# EAGLE board IO Valve (EAGLE 9.2.2)
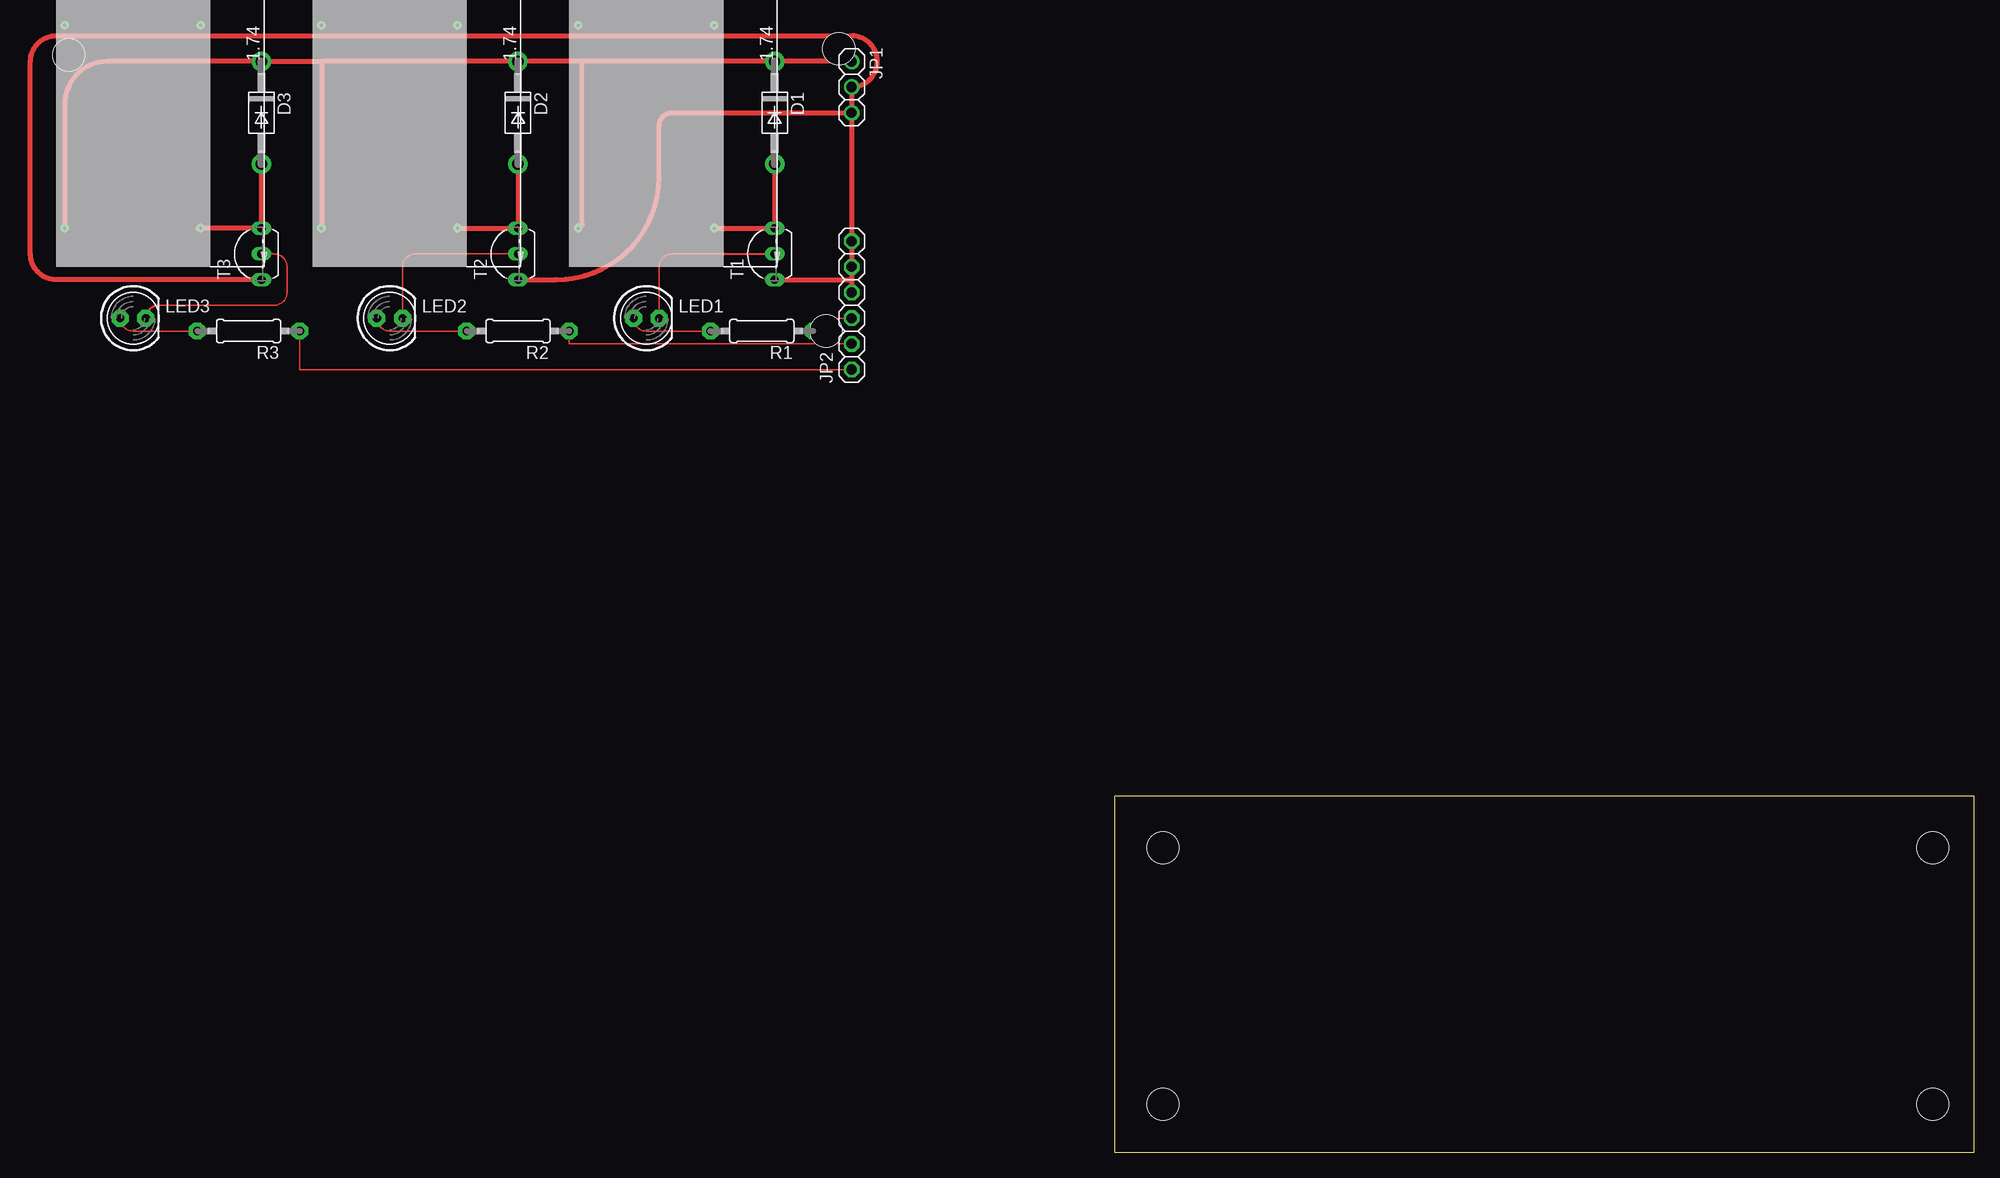
[diagram p0: board, top side]

Size 85.07 x 35.23 mm. Coordinates in mm from the lower left corner, seen from the top.
Outline: 0,0 85.07,0 85.07,35.23 0,35.23 0,0
Copper layers (1*16): Top 0.035mm / dielectric 1.5mm / Bottom 0.035mm
Design rules "OthermillDRC_30_deg_v2": minimum track width 6mil, minimum drill 0.8mm, track to track 6mil, track to pad 6mil, pad to pad 6mil, via to via 6mil, smd to smd 0mil, copper to edge 0mil, drill to drill 6mil, minimum pad ring 10mil, minimum via ring 10mil, stop-mask expansion 1mil, vias tented up to drill 30mil, thermal gap 6mil
Holes 3.17 mm at -103.5,108.58 -27.3,109.22 -28.57,81.28 4.76,4.76 4.76,30.16 80.96,4.76 80.96,30.16

## Footprints (pad centres in the part's own frame; a part is rotated, then mirrored left to right if it is on the bottom)
DO41-10 = drill 1.118 pad 1.93: A 5.08,0; C -5.08,0
1X03 = drill 1.016: 1 -2.54,0; 2 0,0; 3 2.54,0
1X06 = drill 1.016 octagon: 1 -6.35,0; 2 -3.81,0; 3 -1.27,0; 4 1.27,0; 5 3.81,0; 6 6.35,0
LED5MM = drill 0.813 pad 1.676 octagon: A -1.27,0; K 1.27,0
0207/10 = drill 0.813 pad 1.676 octagon: 1 -5.08,0; 2 5.08,0
TO92-EBC-OVAL = drill 0.813 long: B 0,-1.27; C 2.54,-1.27; E -2.54,-1.27
VALVTEST2 = drill 0.3: PAD10 3.835,14.376; PAD11 3.835,0.914; PAD12 23.901,0.914; PAD13 23.901,14.376

## Placement (x,y rotation side)
D1  1N4004  [DO41-10]  -33.66,102.87 270 top  (outside the outline)
D2  1N4004  [DO41-10]  -59.05,102.87 270 top  (outside the outline)
D3  1N4004  [DO41-10]  -84.45,102.87 270 top  (outside the outline)
JP1  [1X03]  -26.04,105.41 270 top  (outside the outline)
JP2  [1X06]  -26.04,83.82 90 top  (outside the outline)
LED1  [LED5MM]  -46.35,82.55 0 top  (outside the outline)
LED2  [LED5MM]  -71.75,82.55 0 top  (outside the outline)
LED3  [LED5MM]  -97.16,82.55 0 top  (outside the outline)
R1  [0207/10]  -34.92,81.28 180 top  (outside the outline)
R2  [0207/10]  -59.05,81.28 180 top  (outside the outline)
R3  [0207/10]  -85.72,81.28 180 top  (outside the outline)
T1  2N2222  [TO92-EBC-OVAL]  -34.92,88.9 90 top  (outside the outline)
T2  2N2222  [TO92-EBC-OVAL]  -60.33,88.9 90 top  (outside the outline)
T3  2N2222  [TO92-EBC-OVAL]  -85.72,88.9 90 top  (outside the outline)
U$1  [VALVTEST2]  -38.73,87.63 90 top  (outside the outline)
U$2  [VALVTEST2]  -64.14,87.63 90 top  (outside the outline)
U$3  [VALVTEST2]  -89.53,87.63 90 top  (outside the outline)

## Library data of the parts
D1-D3 JP1 JP2 LED1-LED3 R1-R3 T1-T3 = adafruit
U$1-U$3 = local eagle library

## Nets
5V: D1.C D2.C D3.C JP1.1 U$1.PAD10 U$2.PAD10 U$3.PAD10
GND: JP1.2 JP2.4 T1.E T2.E T3.E
N$1: D1.A T1.C U$1.PAD11
N$2: LED1.K T1.B
N$3: LED1.A R1.2
N$5: D2.A T2.C U$2.PAD11
N$6: LED2.K T2.B
N$7: LED2.A R2.2
N$9: D3.A T3.C U$3.PAD11
N$10: LED3.K T3.B
N$11: LED3.A R3.2
VALVEGPIO1: JP2.3 R1.1
VALVEGPIO2: JP2.2 R2.1
VALVEGPIO3: JP2.1 R3.1

## Tracks (layer width: path | path; a pad name or v marks a point on that pad's centre or on a via)
5V
  Top 0.508: JP1.1 D1.C -52.7,107.95 | -52.7,107.95 D2.C -78.51,107.95 | U$3.PAD10 -103.91,103.73 arc-90 -99.69,107.95 D3.C -78.51,107.95 | -78.51,107.95 U$2.PAD10 | U$1.PAD10 arc90 -52.7,91.87 -52.7,107.95
GND
  Top 0.508: T3.E -104.78,86.36 arc-90 -107.31,88.9 -107.31,107.95 arc-90 -104.78,110.49 -26.04,110.49 arc-90 -23.5,107.95 arc-90 JP1.2 -26.04,102.87 | T2.E -55.24,86.36 arc90 -45.09,96.52 -45.09,101.6 arc-90 -43.81,102.87 -26.04,102.87 | -26.04,102.87 -26.04,86.36 | -26.04,86.36 JP2.4 | T1.E -26.04,86.36
N$1
  Top 0.508: U$1.PAD11 arc90 -39.62,91.44 T1.C D1.A
N$2
  Top 0.152: LED1.K -45.09,87.63 arc-90 -43.81,88.9 -37.47,88.9
  Top 0.203: -38.73,88.9 -37.47,88.9 T1.B
N$3
  Top 0.152: R1.2 -46.35,81.28 arc-90 LED1.A
N$5
  Top 0.508: D2.A T2.C -65.02,91.44 arc-90 U$2.PAD11
N$6
  Top 0.152: LED2.K -70.48,87.63 arc-90 -69.22,88.9 T2.B
N$7
  Top 0.152: R2.2 -71.75,81.28 arc-90 LED2.A
N$9
  Top 0.152: U$3.PAD11 -90.4,91.54 -90.4,91.44
  Top 0.508: D3.A T3.C -90.4,91.44 -90.81,91.44
N$10
  Top 0.152: -94.61,83.82 -83.19,83.82 arc90 -81.92,85.09 -81.92,87.63 arc90 -83.19,88.9 T3.B
  Top 0.203: LED3.K arc-90 -94.61,83.82
N$11
  Top 0.152: -98.32,82.55 LED3.A arc90 -97.16,81.28 R3.2
VALVEGPIO1
  Top 0.152: JP2.3 -28.57,82.55 R1.1
VALVEGPIO2
  Top 0.152: JP2.2 -53.98,80.01 R2.1
VALVEGPIO3
  Top 0.152: JP2.1 -80.64,77.47 R3.1